# EAGLE board Patch-Panel (EAGLE 8.4.3)
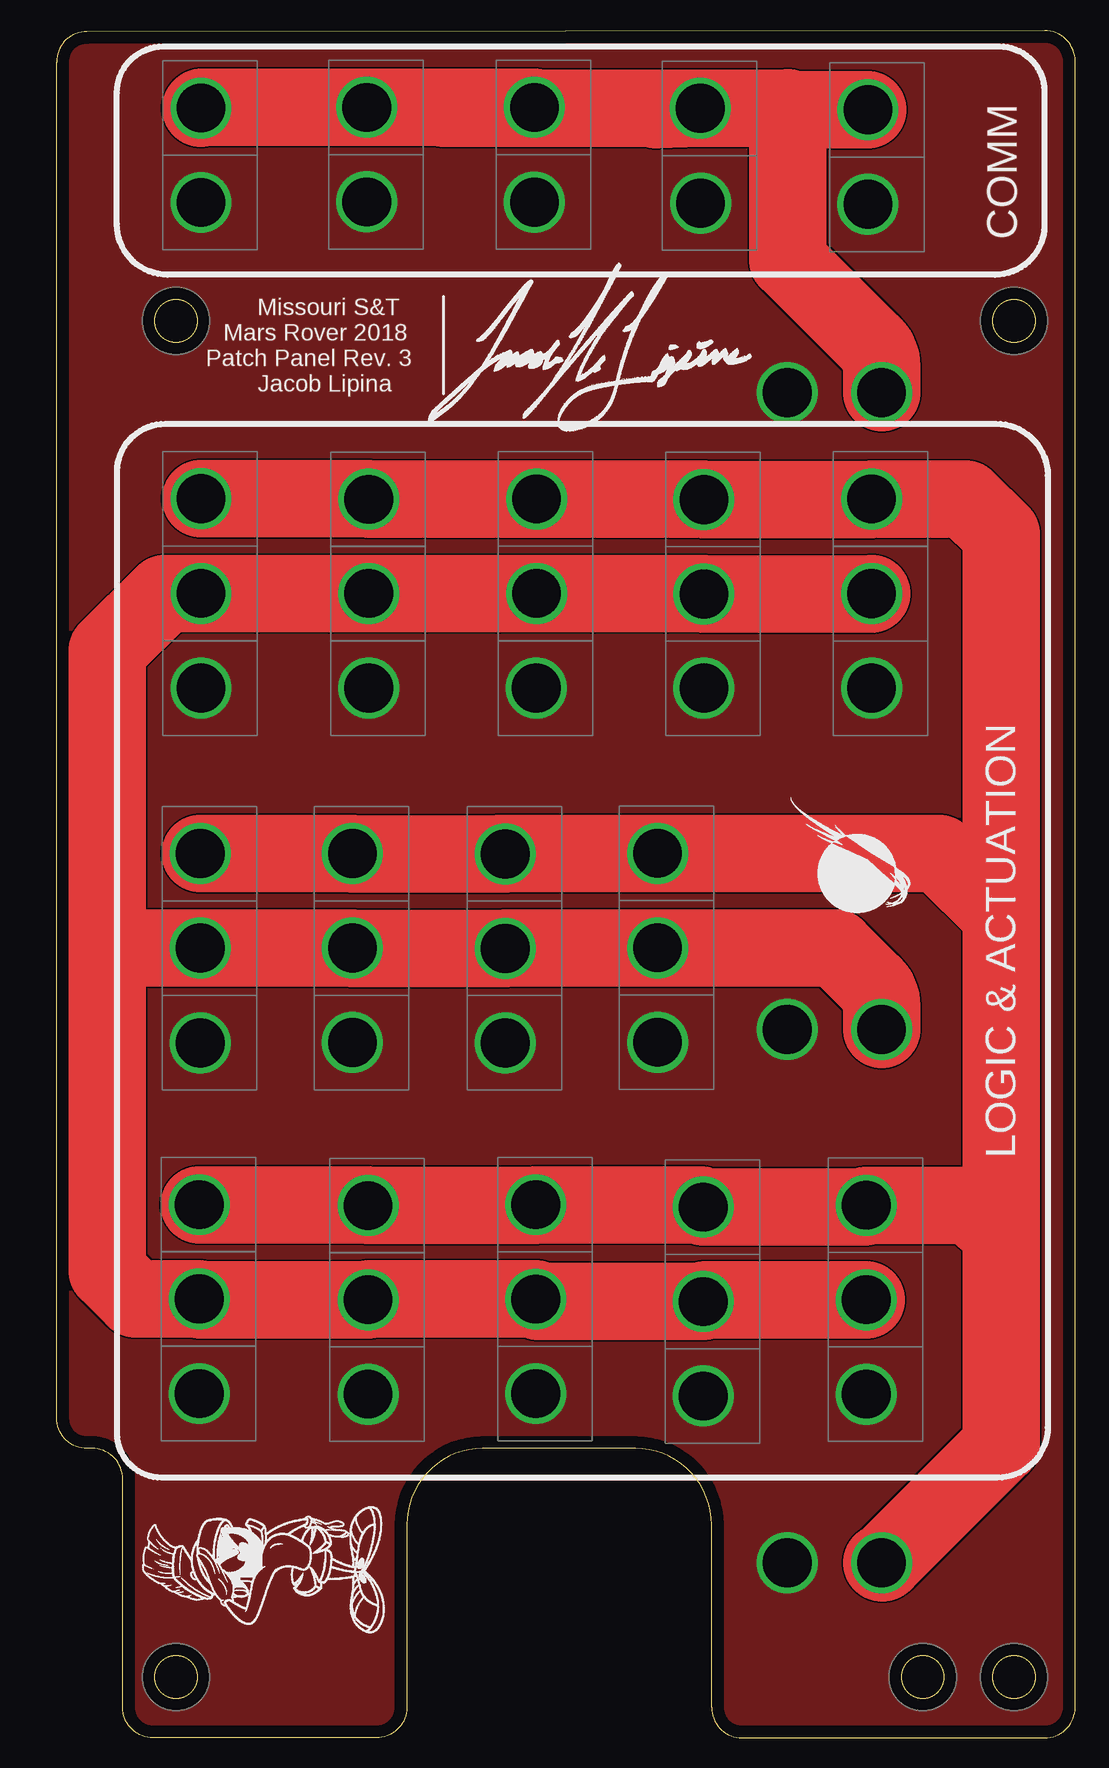
[diagram p0: board, top side]
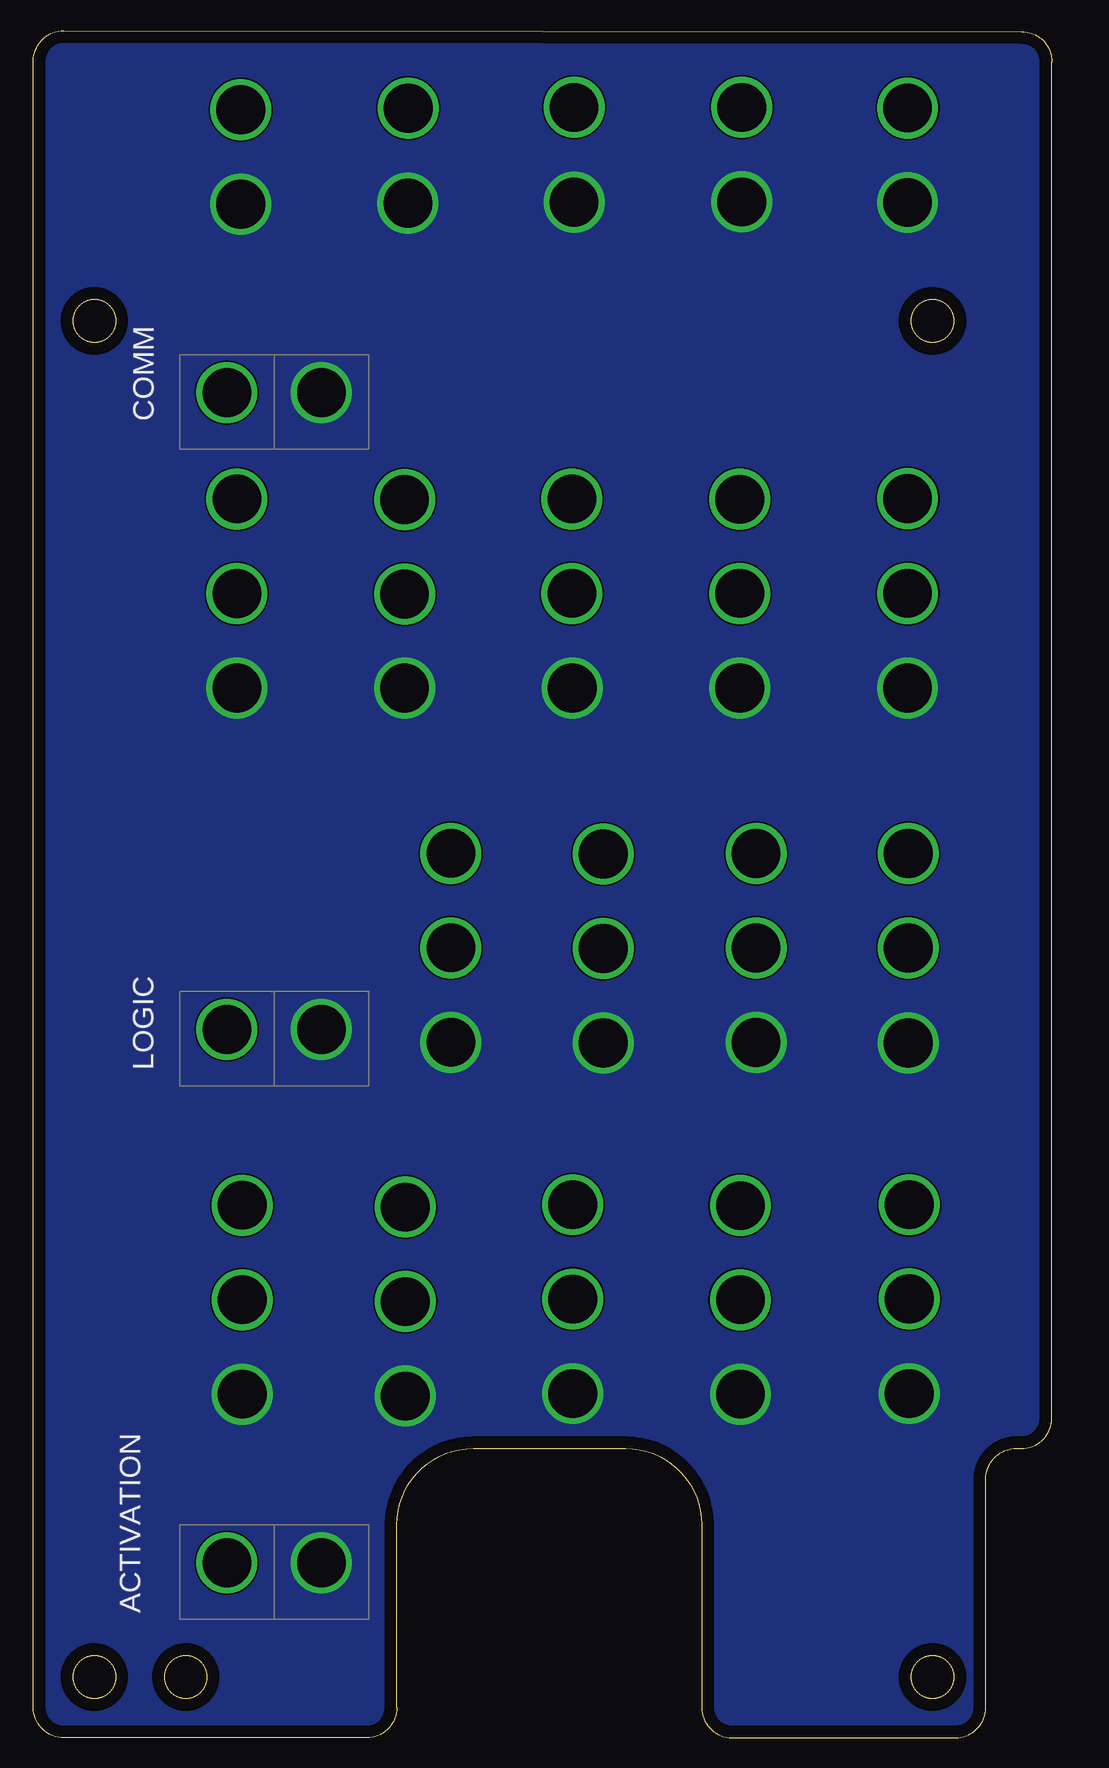
[diagram p1: board, bottom side, seen from below]

Size 84.89 x 142.32 mm. Coordinates in mm from the lower left corner, seen from the top.
Outline: 84.89,2.54 84.89,139.78 arc90 82.35,142.32 2.54,142.24 arc90 0,139.7 0,26.67 arc90 2.54,24.13 2.97,24.13 arc-90 5.51,21.59 5.51,2.54 arc90 8.05,0 26.64,0 arc90 29.18,2.54 29.18,17.78 arc-90 35.53,24.13 48.23,24.13 arc-90 54.58,17.78 54.58,2.54 arc90 57.12,0 82.35,0 arc90 84.89,2.54
Copper layers (1*16): Top 0.035mm / dielectric 1.5mm / Bottom 0.035mm
Design rules "advanced_circuits_standard": minimum track width 5mil, minimum drill 10mil, track to track 5mil, track to pad 5mil, pad to pad 5mil, via to via 5mil, smd to smd 5mil, copper to edge 40mil, drill to drill 5mil, minimum pad ring 10mil, minimum via ring 8mil, stop-mask expansion 4mil, vias tented up to drill 0mil, thermal gap 10mil

## Footprints (pad centres in the part's own frame; a part is rotated, then mirrored left to right if it is on the bottom)
APP45_PCB_VERT = drill 4.064: P$1 3.937,3.175

## Placement (x,y rotation side)
H3  MOUNTING_HOLE#6  [#6_SCREW]  9.96,118.11 0 top
H4  MOUNTING_HOLE#6  [#6_SCREW]  79.81,5.08 0 top
H5  MOUNTING_HOLE#6  [#6_SCREW]  72.19,5.08 0 top
H6  MOUNTING_HOLE#6  [#6_SCREW]  9.96,5.08 0 top
H7  MOUNTING_HOLE#6  [#6_SCREW]  79.81,118.11 0 top
J1  APPPP45_PCB_VERT  [APP45_PCB_VERT]  64.82,17.78 180 bottom
J2  APPPP45_PCB_VERT  [APP45_PCB_VERT]  56.95,17.78 180 bottom
J3  APPPP45_PCB_VERT  [APP45_PCB_VERT]  64.82,62.23 180 bottom
J4  APPPP45_PCB_VERT  [APP45_PCB_VERT]  56.95,115.32 180 bottom
J5  APPPP45_PCB_VERT  [APP45_PCB_VERT]  64.82,115.32 180 bottom
J6  APPPP45_PCB_VERT  [APP45_PCB_VERT]  56.95,62.23 180 bottom
J7  APPPP45_PCB_VERT  [APP45_PCB_VERT]  64.31,32.59 270 top
J8  APPPP45_PCB_VERT  [APP45_PCB_VERT]  64.31,40.46 270 top
J9  APPPP45_PCB_VERT  [APP45_PCB_VERT]  64.31,48.34 270 top
J10  APPPP45_PCB_VERT  [APP45_PCB_VERT]  50.72,32.44 270 top
J11  APPPP45_PCB_VERT  [APP45_PCB_VERT]  46.91,69.8 270 top
J12  APPPP45_PCB_VERT  [APP45_PCB_VERT]  36.75,48.39 270 top
J13  APPPP45_PCB_VERT  [APP45_PCB_VERT]  21.49,61.9 270 top
J14  APPPP45_PCB_VERT  [APP45_PCB_VERT]  36.75,40.51 270 top
J15  APPPP45_PCB_VERT  [APP45_PCB_VERT]  46.91,77.67 270 top
J16  APPPP45_PCB_VERT  [APP45_PCB_VERT]  8.71,32.64 270 top
J17  APPPP45_PCB_VERT  [APP45_PCB_VERT]  22.78,40.46 270 top
J18  APPPP45_PCB_VERT  [APP45_PCB_VERT]  22.78,48.31 270 top
J19  APPPP45_PCB_VERT  [APP45_PCB_VERT]  34.21,61.87 270 top
J20  APPPP45_PCB_VERT  [APP45_PCB_VERT]  34.21,69.75 270 top
J21  APPPP45_PCB_VERT  [APP45_PCB_VERT]  34.21,77.62 270 top
J22  APPPP45_PCB_VERT  [APP45_PCB_VERT]  22.78,32.59 270 top
J23  APPPP45_PCB_VERT  [APP45_PCB_VERT]  8.71,40.54 270 top
J24  APPPP45_PCB_VERT  [APP45_PCB_VERT]  50.72,48.18 270 top
J25  APPPP45_PCB_VERT  [APP45_PCB_VERT]  8.81,61.87 270 top
J26  APPPP45_PCB_VERT  [APP45_PCB_VERT]  50.72,40.31 270 top
J27  APPPP45_PCB_VERT  [APP45_PCB_VERT]  8.71,48.39 270 top
J28  APPPP45_PCB_VERT  [APP45_PCB_VERT]  50.47,139.78 270 top
J29  APPPP45_PCB_VERT  [APP45_PCB_VERT]  46.91,61.93 270 top
J30  APPPP45_PCB_VERT  [APP45_PCB_VERT]  64.44,139.65 270 top
J31  APPPP45_PCB_VERT  [APP45_PCB_VERT]  36.75,32.64 270 top
J32  APPPP45_PCB_VERT  [APP45_PCB_VERT]  36.65,139.85 270 top
J33  APPPP45_PCB_VERT  [APP45_PCB_VERT]  50.5,131.88 270 top
J34  APPPP45_PCB_VERT  [APP45_PCB_VERT]  22.68,139.85 270 top
J35  APPPP45_PCB_VERT  [APP45_PCB_VERT]  22.68,131.98 270 top
J36  APPPP45_PCB_VERT  [APP45_PCB_VERT]  22.83,91.44 270 top
J37  APPPP45_PCB_VERT  [APP45_PCB_VERT]  64.74,99.31 270 top
J38  APPPP45_PCB_VERT  [APP45_PCB_VERT]  64.74,107.21 270 top
J39  APPPP45_PCB_VERT  [APP45_PCB_VERT]  64.74,91.44 270 top
J40  APPPP45_PCB_VERT  [APP45_PCB_VERT]  21.49,69.77 270 top
J41  APPPP45_PCB_VERT  [APP45_PCB_VERT]  21.49,77.65 270 top
J42  APPPP45_PCB_VERT  [APP45_PCB_VERT]  64.44,131.78 270 top
J43  APPPP45_PCB_VERT  [APP45_PCB_VERT]  8.81,69.77 270 top
J44  APPPP45_PCB_VERT  [APP45_PCB_VERT]  8.86,139.8 270 top
J45  APPPP45_PCB_VERT  [APP45_PCB_VERT]  8.86,131.93 270 top
J46  APPPP45_PCB_VERT  [APP45_PCB_VERT]  36.83,107.21 270 top
J47  APPPP45_PCB_VERT  [APP45_PCB_VERT]  36.65,131.95 270 top
J48  APPPP45_PCB_VERT  [APP45_PCB_VERT]  36.83,99.34 270 top
J49  APPPP45_PCB_VERT  [APP45_PCB_VERT]  8.86,107.24 270 top
J50  APPPP45_PCB_VERT  [APP45_PCB_VERT]  50.77,91.44 270 top
J51  APPPP45_PCB_VERT  [APP45_PCB_VERT]  22.83,99.34 270 top
J52  APPPP45_PCB_VERT  [APP45_PCB_VERT]  50.77,107.16 270 top
J53  APPPP45_PCB_VERT  [APP45_PCB_VERT]  8.86,91.44 270 top
J54  APPPP45_PCB_VERT  [APP45_PCB_VERT]  8.86,99.34 270 top
J55  APPPP45_PCB_VERT  [APP45_PCB_VERT]  22.83,107.19 270 top
J56  APPPP45_PCB_VERT  [APP45_PCB_VERT]  36.8,91.44 270 top
J57  APPPP45_PCB_VERT  [APP45_PCB_VERT]  50.77,99.29 270 top
J58  APPPP45_PCB_VERT  [APP45_PCB_VERT]  8.81,77.65 270 top
LOGO1  MRDT_LOGO  [MRDT_LOGO]  71.98,68.76 90 top
U$1  JACOB_SIG  [JACOB_SIG]  29.29,106.2 0 top
U$2  MARVIN-THE-MARTIAN  [MARVIN]  27.81,7.8 90 top

## Library data of the parts
H3-H7 LOGO1 U$2 = MRDT-Hardware
J1-J58 = MRDT-Connectors
U$1 = Jacob Signature

## Nets
ACT-12V: J1.P$1 J9.P$1 J12.P$1 J15.P$1 J18.P$1 J21.P$1 J24.P$1 J27.P$1 J38.P$1 J41.P$1 J46.P$1 J49.P$1 J52.P$1 J55.P$1 J58.P$1
COM-12V: J5.P$1 J28.P$1 J30.P$1 J32.P$1 J34.P$1 J44.P$1
GND: J2.P$1 J4.P$1 J6.P$1 J7.P$1 J10.P$1 J13.P$1 J16.P$1 J19.P$1 J22.P$1 J25.P$1 J29.P$1 J31.P$1 J33.P$1 J35.P$1 J36.P$1 J39.P$1 J42.P$1 J45.P$1 J47.P$1 J50.P$1 J53.P$1 J56.P$1
LOG-12V: J3.P$1 J8.P$1 J11.P$1 J14.P$1 J17.P$1 J20.P$1 J23.P$1 J26.P$1 J37.P$1 J40.P$1 J43.P$1 J48.P$1 J51.P$1 J54.P$1 J57.P$1

## Tracks (layer width: path | path; a pad name or v marks a point on that pad's centre or on a via)
ACT-12V
  Top 6.452: 71.15,44.4 J9.P$1 | J9.P$1 67.34,44.25 J24.P$1 53.7,44.45 J12.P$1 39.85,44.37 J18.P$1 25.88,44.45 J27.P$1 | 78.71,68.58 73.56,73.74 J15.P$1 36.88,73.74 36.8,73.66 37.36,73.66 J21.P$1 24.69,73.69 J41.P$1 J58.P$1 | 78.71,41.91 78.71,24.43 68.97,14.7 arc-45 J1.P$1 | 78.71,41.91 78.71,68.58 | J9.P$1 76.23,44.4 78.71,41.91 | J49.P$1 25.96,103.3 J55.P$1 39.98,103.25 J46.P$1 53.9,103.28 J52.P$1 67.87,103.23 J38.P$1 75.77,103.28 78.71,100.33 78.71,68.58
COM-12V
  Top 6.452: J28.P$1 49.96,135.71 | J28.P$1 32.28,135.84 J32.P$1 J34.P$1 12.09,135.91 J44.P$1 | 60.88,135.84 60.93,135.89 60.93,123.19 68.01,116.11 arc-45 68.76,114.31 J5.P$1 | 60.88,135.84 J28.P$1 | J30.P$1 61.01,135.71 60.88,135.84
GND
  pour Bottom: -9.09,157.56 93.78,157.56 97.59,-2.46 -3.81,-2.54
  pour Top: 91.24,155.02 -11.63,152.48 -5.08,-2.54 96.32,0.08
LOG-12V
  Top 6.452: J8.P$1 54.05,36.52 J26.P$1 40.13,36.37 J14.P$1 26.01,36.58 J17.P$1 11.96,36.52 J23.P$1 6.55,36.6 4.24,38.91 4.24,66.04 | 4.24,66.04 4.24,90.63 9.02,95.4 J54.P$1 J51.P$1 J48.P$1 53.9,95.4 J57.P$1 67.89,95.35 J37.P$1 | 4.24,66.04 4.44,65.84 J43.P$1 J40.P$1 24.69,65.81 J20.P$1 37.44,65.86 J11.P$1 64.92,65.86 68.01,62.77 arc-45 68.76,60.98 J3.P$1

## Text on the board
tPlace: COMM | Missouri S&T / Mars Rover 2018 / Patch Panel Rev. 3 / Jacob Lipina | LOGIC & ACTUATION
bNames: COMM | LOGIC | ACTIVATION